# Altium PCB ESP32 with USBC PCB.PcbDoc (part 3 of 3)
Units mil, origin at the board's own origin, x right, y up, seen from the top; angles counter-clockwise.
Board outline 2700 x 1000 mil, 4 copper layers (L1, L2, L3, L4), stack 61.583 mil thick; 64 components, 73 nets, 299 pads, 161 vias.
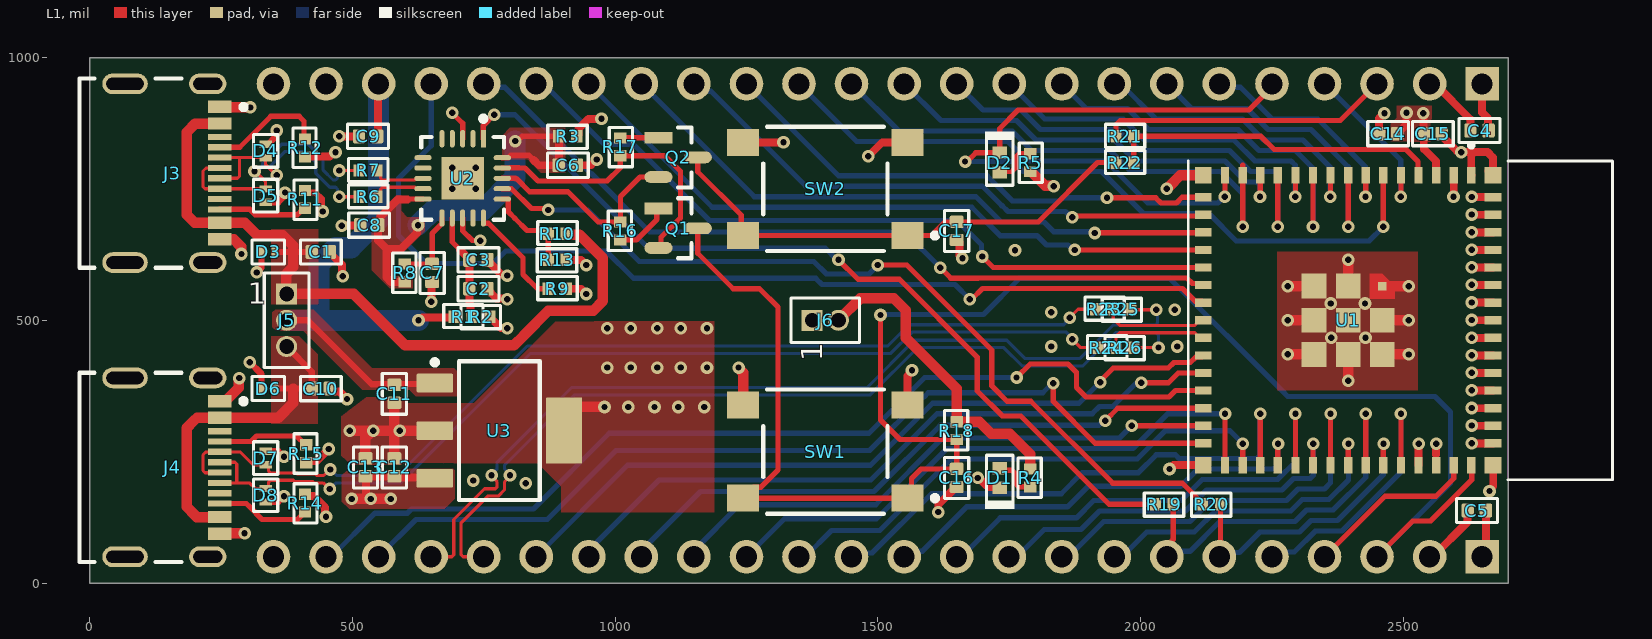
[diagram p0: L1 view]

## Via types
v1: diameter 24, hole 12, L1 to L4, tented both sides, 159 vias
v2: diameter 24/24/24 (per signal layer), hole 12, L1 to L4, tented both sides, 2 vias

## Nets (pads, with @x,y where several pads share a name; then routed paths per layer and width w, separated by ;. In a path a pad name is that pad's centre, name@x,y a point inside that pad or via, vN(x,y) a via of type N, cw(c..) or ccw(c..) an arc to the next point about the centre after c; other vN are vias at no path point) (continued)
GND: (continued)
  L1 w12: J3.A1B12 J3.A1B12@248.09,905.45 ; v1(305,420) 327.2,397.8 D6.2 ; v1@305.55,905.45 v1(306,905) ; v1(318,591) 327.2,600.2 D3.2 ; D8.2 359.41,154.41 v1@365,160 ; D7.2 359.41,250.59 v1(370,240) ; D5.2 359.41,724.41 369.7,734.7 369.7,740.7 v1(372,743) ; D4.2 339.92,835.04 353.7,848.82 353.7,858.7 v1(356,861) ; R11.1 414.04,742.96 429.85,742.96 441.7,731.11 441.7,709.3 v1(444,707)
  L1 w15: J3.B1A12 274.06,653.94 ; v1@288.23,630 288.23,626.77 v1(289,626) ; R14.1 413.13,165.89 426.3,165.89 448.28,143.91 448.28,127.72 v1(450,126) ; R12.1@410.45,811.43 457,811.43 465.56,820 v2(468,820) ; R15.1 415.13,232.12 432.12,232.12 v1(455,255) ; C10.1 457.2,368.62 461.52,364.31 475.69,364.31 v1(490,350) ; C1.1 457.2,628.62 480.28,605.55 480.28,585.72 v1(482,584) ; v1(475,850) C9.1 ; v2(480,680) 480.5,680.5 514.3,680.5 C8.1 ; v1(650,535) 651,536 651,571.8 C7.1 ; C2.1 757.2,558.62 774.1,541.72 793.28,541.72 v1(795,540) ; C3.1 757.2,613.62 784.1,586.72 793.28,586.72 v1(795,585) ; R9.2 935,560 v1(945,550) ; R13.1 935,615 v1(945,605) ; C6.1 954,795 v1(965,806) ; SW2.4 v1(1320.42,838.58) v1@1322,837 ; v1(1482,812) 1508.58,838.58 SW2.3 SW2.3@1559,836.08 ; SW1.3 1556.5,394.06 1565,402.56 v1(1565,405) ; v1(1615,135) 1615,149.17 1648.62,182.8 C16.2 ; C17.1 1651.38,652.8 1655.69,648.48 1655.69,623.31 v1(1661,618) ; v1(1690,200) 1692.44,200 1707.86,184.57 ; 1709.5,182.94 D1.1@1730.36,182.94 ; D1.1@1728.73,184.57 D1.1@1730.36,182.94 ; D1.1 D1.1@1730.36,182.94 ; v1(2055,217) 2062.41,224.41 U1.64 ; C14.1@2458.11,859.31 C14.1 2453.8,883.8 v1(2464,894) ; U1.42 v1@2528.9,264.57 ; J2.2 2556,50 2622,116 2622,137.2 C5.1 ; 2562.36,244.49 v1@2562.36,264.57 ; C15.1 2577.52,850.69 2577.52,846.66 2602.45,821.72 2608.28,821.72 v1(2610,820) 2635,820 ; v1@2595.83,735.43 U1.2 ; U1.1@2629.67,775.96 U1.1 2629.29,814.29 2635,820 ; v1@2630.47,265.75 U1.46 ; v1@2630.47,299.21 U1.47 ; v1@2630.47,332.68 U1.48 ; v1@2630.47,366.14 U1.49 ; v1@2630.47,399.61 U1.50 ; v1@2630.47,433.07 U1.51 ; v1@2630.47,466.54 U1.52 ; v1@2630.47,500 U1.53 ; v1@2630.47,533.46 U1.54 ; v1@2630.47,566.93 U1.55 ; v1@2630.47,600.39 U1.56 ; v1@2630.47,633.86 U1.57 ; v1@2630.47,667.32 U1.58 ; v1@2630.47,700.79 U1.59 ; v1@2630.47,734.25 U1.60 ; J1.1 2650,895.5 2661.31,884.19 2661.31,860.9 C4.1@2662.2,860 ; U1.62@2662.38,783.84 U1.62 2670.63,809.37 2660,820 2635,820 ; v1(2664,175) 2664,177.44 2671,184.44 2671,224.04 U1.65
  L1 w20: J4.B1A12@247.19,93.64 J4.B1A12 248.09,94.55 294.55,94.55 v1(295,95) ; J4.A1B12 249.45,347.87 260.28,347.87 284.23,371.83 284.23,389.23 v1(285,390) ; J3.A1B12@248.09,905.45 v1@305.55,905.45 ; 274.06,653.94 288.23,639.77 v1@288.23,630 ; v1(495,290) 525,290 ; C13.1 525,276.44 v1@537.8,289.23 ; v1@530,290 v1@538.15,290 ; v1@531.78,283.22 v1@537.8,289.23 ; C12.1 v1@580,290 ; C11.1 v1@580,290 ; v1(590,290) U3.2 ; U3.4 903.03,310.55 927.48,335 v1(980,335) ; v1(1235,410) 1235,408.92 1243.5,400.41 SW1.4 ; v1@2055,755 2075.59,775.59 U1.63 ; v1(2280,565) U1.71 ; v1@2280.04,435.04 U1.73 ; v1(2280.02,500.02) U1.72 ; v1(2395.02,384.98) U1.70 ; U1.69 v1@2395.04,615 ; U1.68 v1@2510.04,435.04 ; U1.67 v1@2510.04,500 ; U1.66 v1@2510.04,564.96 ; v1@537.8,289.23 538.15,289.23 v1@538.15,290 ; v1@538.15,290 v1(540,290) v1@580,290
  other v1: 370,165 830,190 730,195 2529.33,265 2562.8,265 2630.04,266.18 2630.04,299.65 2630.04,333.11 1025,335 1075,335 1120,335 1170,335 2630.04,366.57 2630.04,400.04 985,410 1030,410 1080,410 1125,410 1175,410 2630.04,433.5 2280.02,435.06 2510.06,435.02 1830,450 2070,450 2363,467 2428,467 2630.04,466.97 985,485 1030,485 1080,485 1125,485 1175,485 2510.06,499.98 2630.04,500.43 1830,515 2065,520 2362,532 2427,532 2630.04,533.9 2510.06,564.94 2630.04,567.36 2630.04,600.83 2395.06,615.02 1761,633 2630.04,634.29 2630.04,667.76 2630.04,701.22 2595.39,735 2630.04,734.69 690,750 735,750 2050,750 690,790 735,790
GPIO0: R21.2 R22.2 U1.4 | length 637.7
  L1 w10: R22.2 R21.2 2229.25,850 2254.25,825 2505,825 2528.02,801.98 2528.02,776.47 U1.4
GPIO1: J1.4 U1.5 | length 315.2
  L1 w10: v1@2495.43,735.43 U1.5
  L4 w10: J1.4 2495,805 v1(2495,735)
GPIO2: D2.1 J1.5 U1.6 | length 1653.2
  L1 w10: v1(1666,802) 1669.79,802 1686.49,818.7 D2.1 1732,865 1767,900 2206,900 2250,944 J1.5 ; v1(2461.97,678.03) U1.6
  L4 w10: v1(1666,802) 1757.33,802 1776.33,783 1925.43,783 2005.43,703 2130,703 2181.97,651.03 2434.97,651.03 v1(2461.97,678.03) ; J1.5 J1.5@2260,950
GPIO3: J1.6 U1.7 | length 440.6
  L1 w10: v1@2428.5,735.43 U1.7
  L4 w10: J1.6 2156.62,943.38 2190.15,943.38 2250.53,883 2337,883 2428.07,791.93 v1(2428.07,735)
GPIO4: J1.7 U1.8 | length 621.4
  L1 w10: v1(2395.04,678.03) U1.8
  L4 w10: J1.7 2097,903 2202.25,903 2242.25,863 2324,863 2395,792 2395,729.89 2395.04,729.85 v1@2395.04,678.66
GPIO5: J1.8 U1.9 | length 573.1
  L1 w10: v1@2361.57,735.43 U1.9
  L4 w10: J1.8 1962.24,950 2029.24,883 2193.96,883 2233.96,843 2309,843 2361.14,790.86 v1(2361.14,735)
GPIO6: J1.9 U1.10 | length 754.5
  L1 w10: v1(2328.11,678.03) U1.10
  L4 w10: J1.9 1850,949.61 1896.61,903 1975.14,903 2015.14,863 2185.68,863 2225.68,823 2294.42,823 2329,788.43 2329,678.92 v1(2328.11,678.03)
GPIO7: J1.10 U1.11 | length 708.5
  L1 w10: v1@2294.65,735.43 U1.11
  L4 w10: J1.10 1750.75,950 1817.75,883 1966.85,883 2006.85,843 2177.4,843 2217.39,803 2286.14,803 2294.21,794.93 v1(2294.21,735)
GPIO8: J1.11 U1.12 | length 879.5
  L1 w10: v1(2261.18,678.03) U1.12
  L4 w10: J1.11 1700,900 1772.47,900 1809.47,863 1958.57,863 1998.57,823 2169.11,823 2209.11,783 2255.32,783 2261.18,777.14 v1(2261.18,678.03)
GPIO9: J1.12 U1.13 | length 819.1
  L1 w10: v1@2227.72,735.43 U1.13
  L4 w10: J1.12 1620,880 1764.18,880 1801.18,843 1950.28,843 1990.28,803 2160.83,803 2200.83,763 2220.86,763 2226.72,757.14 2226.72,735.57 v1(2227.28,735)
GPIO10: J1.13 U1.14 | length 1010.9
  L1 w10: v1(2194.25,678.03) U1.14 2194.25,795
  L4 w10: J1.13 1540,860 1755.9,860 1792.9,823 1942,823 1982,783 2152.54,783 2194.25,741.29 v1(2194.25,678.03)
GPIO11: J1.14 U1.15 | length 949.5
  L1 w10: v1@2160.79,735.43 U1.15
  L4 w10: J1.14 1460,840 1747.62,840 1784.62,803 1933.72,803 2013.72,723 2147.5,723 2159.5,735 v1(2160.35,735)
GPIO12: J1.15 U1.16 | length 973.1
  L1 w10: v1(1936,733) 2028.91,732.91 2038.82,723 2068.13,723 2079.38,734.25 U1.16
  L4 w10: J1.15 1425,775 1708,775 1756,727 1845.18,727 1851.18,733 v1(1936,733)
GPIO13: J1.16 U1.17 | length 1076.6
  L1 w10: v1(1870,696) 1872.39,698.39 2117.06,698.39 U1.17
  L4 w10: J1.16 1164.61,950 1178.85,935.77 1182.23,935.77 1363,755 1699,755 1736,718 1736.72,718 1747.72,707 1857.14,707 1868.14,696 v1(1870,696)
GPIO14: J1.17 U1.18 | length 1187.4
  L1 w10: v1(1913,666) 1913.66,666.66 2118.79,666.66 U1.18
  L4 w10: J1.17 1265,735 1687,735 1735,687 1816,687 1834.33,668.67 1909.67,668.67 v1@1912.67,665.67
GPIO15: J1.18 U1.19 | length 1300.4
  L1 w10: v1(1874.79,633.86) U1.19
  L4 w10: J1.18 1185,715 1678.72,715 1732.72,661 1803,661 1821,643 1861.93,643 1871.07,633.86 v1(1874.79,633.86)
GPIO16: J1.19 U1.20 | length 1426.5
  L1 w10: v1(1698.66,621.34) 1719.61,600.39 U1.20
  L4 w10: J1.19 864,950 979,835 1035,835 1180,690 1650.93,690 1697.32,643.61 1697.32,622.68 v1(1698.66,621.34)
GPIO17: J1.20 U1.21 | length 1528.9
  L1 w10: v1(1619,600) 1639,580 1690.5,580 1690.9,580.39 2087.89,580.39 2098.48,569.8 2116.57,569.8 U1.21
  L4 w10: J1.20 756.83,943.17 790.36,943.17 872.09,861.44 872.09,860.73 953.82,779 955,779 1066,668 1551,668 v1(1619,600)
GPIO18: J1.21 U1.22 | length 1935.7
  L1 w10: v1(1675,540) 1678.79,540 1699.18,560.39 2079.61,560.39 2093.07,546.93 2103.66,536.34 2116.57,536.34 U1.22
  L4 w10: J1.21 650,905 650,832 600,782 588,770 588,661 641,608 768,608 792,632 983,632 1035,580 1381.72,580 1393.72,568 1647,568 v1(1675,540)
GPIO21: J2.19 U1.25 | length 1429.3
  L1 w10: v1(1923,382) 1923,384 1948,409 2052.72,409 2063.32,419.61 2094.61,419.61 2105.2,430.2 2116.57,430.2 U1.25
  L4 w10: J2.19 1024,224 1486.29,224 1604.29,342 1883,342 v1(1923,382)
GPIO26: J2.18 U1.26 | length 1322.8
  L1 w10: v1(2001,381) 2053,381 2071.61,399.61 U1.26
  L4 w10: J2.18 950,64.61 952.39,64.61 1083.78,196 1486.58,196 1612.58,322 1907.82,322 1921.82,336 1947,336 1989.32,378.32 1998.32,378.32 v1(2001,381)
GPIO33: J2.17 U1.28 | length 1195.1
  L1 w10: v1(1933,309) 1956.68,332.68 U1.28
  L4 w10: J2.17 1050,64.61 1053.39,64.61 1162.78,174 1492.86,174 1618.86,300 1920.21,300 1929.21,309 v1(1933,309)
GPIO34: J2.16 U1.29 | length 1067.7
  L1 w10: 1995,299 1995.21,299.21 U1.29
  L4 w10: J2.16 1150,62 1237,149 1496.15,149 1623.15,276 1960,276 v1(1983,299)
GPIO35: J2.15 U1.31 | length 1121
  L1 w10: U1.31 v1(2160.79,321.97)
  L4 w10: J2.15 1322.28,122.28 1497.72,122.28 1631.43,256 1985.43,256 2051.4,321.97 v1(2160.79,321.97)
GPIO36: J2.14 U1.32 | length 994.6
  L1 w10: U1.32 v1@2194.25,264.57
  L4 w10: J2.14 1362,50 1412,100 1503.72,100 1639.72,236 1993.72,236 2047.72,290 2169.69,290 v1(2194.69,265)
GPIO37: J2.13 U1.33 | length 1039.6
  L1 w10: U1.33 v1(2227.72,321.97)
  L4 w10: J2.13 1457.23,57.23 1489.23,57.23 1602,170 1849,170 1889,210 1996,210 2030,244 2066.18,244 2073.18,237 2221.14,237 2227,242.86 2227,321.25 v1(2227.72,321.97)
GPIO38: J2.12 U1.34 | length 863.6
  L1 w10: U1.34 v1@2261.18,264.57
  L4 w10: J2.12 1560.33,60.33 1584.33,60.33 1669,145 1861,145 1900,184 2076.11,184 2109.11,217 2252.54,217 2261.61,226.07 v1(2261.61,265)
GPIO39: J2.11 U1.35 | length 908.3
  L1 w10: U1.35 v1(2294.65,321.97)
  L4 w10: J2.11 1659,50 1733,124 1878,124 1911,157 2077.4,157 2117.4,197 2260.83,197 2294.5,230.67 2294.5,238.5 2294.65,238.65 v1(2294.65,321.97)
GPIO40: J2.10 U1.36 | length 743
  L1 w10: U1.36 v1@2328.11,264.57
  L4 w10: J2.10 1764.61,50 1816.61,102 1886.72,102 1921.72,137 1948,137 2085.68,137 2125.68,177 2269.11,177 2291.11,199 2322.69,199 2328.54,204.86 v1(2328.54,265)
GPIO41: J2.9 U1.37 | length 798.7
  L1 w10: U1.37 v1(2361.57,321.97)
  L4 w10: J2.9 1863,50 1930,117 2093.96,117 2133.96,157 2277.4,157 2299.4,179 2349.86,179 2361.57,190.71 v1(2361.57,321.97)
GPIO42: J2.8 U1.38 | length 614.9
  L1 w10: U1.38 v1@2395.04,264.57
  L4 w10: J2.8 1964.61,50 2011.61,97 2102.25,97 2142.25,137 2285.68,137 2307.68,159 2358.15,159 2395.47,196.33 v1(2395.47,265)
GPIO45: J2.5 U1.41 | length 520.4
  L1 w10: U1.41 v1(2495.43,321.97)
  L4 w10: J2.5 2259,59 2292.53,59 2332.53,99 2383,99 2495.43,211.43 v1(2495.43,321.97)
GPIO46: J2.4 U1.44 | length 333.1
  L1 w10: J2.4 2465,165 2562,165 2595.83,198.83 U1.44
GPIO47: J2.23 U1.27 | length 1869.5
  L1 w10: v1(1764,391) 1790,417 1861.9,417 1878,400.9 1878,372 1896,354 2054.28,354 2066.43,366.14 U1.27
  L4 w10: J2.23 460,50 543,133 604.72,133 612.72,141 845,141 989,285 1483.18,285 1589.18,391 v1(1764,391)
GPIO48: J2.22 U1.30 | length 1773.7
  L1 w10: v1(1834,380) 1834,345.49 1913.74,265.75 U1.30
  L4 w10: J2.22 621,121 871,121 1002,252 1484.43,252 1586.43,354 1588.01,354 1596.01,362 1813.82,362 1831.82,380 v1(1834,380)
NetD1_2: D1.2 R4.1 | length 83.3
  L1 w10: D1.2 1735.88,214.82 1754.92,214.82 1760.78,208.96 1760.78,190.98 1768.76,182.99 R4.1
NetD2_2: D2.2 R5.1 | length 93.6
  L1 w10: D2.2 1733.64,782.94 1754.92,782.94 1763.19,791.21 1763.19,811.15 1769.05,817.01 R5.1 1791.18,817.01 R5.1@1796.81,822.64
NetJ3_A5: J3.A5 R12.2 | length 223.3
  L1 w10: J3.A5 285.95,829.13 344.82,888 399,888 408.23,878.77 408.23,846.77 R12.2
NetJ3_B5: J3.B5 R11.2 | length 171.5
  L1 w10: J3.B5 304.9,711.02 314.92,701 395.7,701 402.06,707.36 404.37,707.36 R11.2
NetJ4_A5: J4.A5 R15.2 | length 175.8
  L1 w10: J4.A5 307.3,269.29 318.01,280 393.83,280 410.82,263.01 R15.2
NetJ4_B5: J4.B5 R14.2 | length 181.4
  L1 w10: J4.B5 298.31,151.18 305,144.5 328.5,121 396,121 403.19,128.19 403.19,129.37 408.82,135 R14.2
NetQ1_1: Q1.1 R16.1 | length 107.4
  L1 w10.01: R16.1 1040.57,652.99 1079.56,691.99 1079.56,709.39 Q1.1
NetQ2_1: Q2.1 R17.1 | length 72.7
  L1 w10: R17.1 1010.2,847.2 1082.38,847.2 Q2.1
NetR9_1: R9.1 U2.15 | length 193.5
  L1 w10: U2.15@749.6,684.57 759.39,684.57 769.74,674.21 773.96,670 825,618.96 825,587.43 852.43,560 R9.1
RTS_FTDI: Q1.2 R17.2 U2.19 | length 558.1
  L1 w10: U2.19 799.79,789.69 800.11,790.01 816.68,790.01 817,789.69 828.5,789.69 853.18,765 985,765 1010,790 R17.2 1094.78,812.99 1124.29,783.48 1124.29,694.93 1087.37,658 1087.37,642.39 Q1.2
RXD_FTDI: R19.2 U2.1 | length 1656.5
  L1 w10: U2.1 749.37,870.36 v1(770,890.99) ; v1(1425.27,615) 1462.27,578 1541,578 1689,430 1689,366 1737,318 1772,318 1940,150 R19.2
  L4 w10: v1(770,890.99) 809,890.99 809.5,890.99 1063.5,637 1400.42,637 1422.42,615 v1(1425.27,615)
TXD_FTDI: R20.2 U2.17 | length 1635.8
  L1 w10: U2.17 803.14,750.31 841,712.46 870.54,712.46 v1(873,710) ; v1(1500,605) 1555,605 1717,443 1717,375 1746,346 1791,346 1947,190 2079.17,190 2117.99,151.18 R20.2
  L4 w10: v1(873,710) 948,710 1046,612 1378,612 1402,588 1483,588 v1(1500,605)
U0RXD: J2.6 R20.1 U1.40 | length 576.6
  L1 w10: J2.6 2152.01,52.01 R20.1 ; U1.40 v1@2461.97,264.57
  L4 w10: J2.6 2158.23,58.23 2188.23,58.23 2227,97 2302.25,97 2324.25,119 2374.72,119 2446.8,191.09 2461.54,205.83 2461.54,221.74 2462.4,222.6 v1(2462.4,265)
U0TXD: J2.7 R19.1 U1.39 | length 764.5
  L1 w10: J2.7 2060.33,60.33 2060.33,81.18 2062.01,82.86 R19.1 ; U1.39 v1(2428.5,321.97)
  L4 w10: J2.7 2060.33,60.33 2093.86,60.33 2150.53,117 2293.96,117 2315.96,139 2366.43,139 2428.5,201.07 2428.5,232.86 v1(2428.5,321.97)
VBUS_SENSE: R10.1 R13.2 U2.16 | length 179.1
  L1 w10: U2.16 796.72,730.63 796.94,730.4 796.94,706.06 809,694 832.25,670.75 867.36,670.75 872.99,665.12 R13.2
pads on no net: J1.24 J3.A8 J3.B8 J4.A8 J4.B8 U2.2 U2.4 U2.5 U2.6 U2.7 U2.14

## Polygon pours and split planes (outlines as drawn)
GND on L1 "GND_L01_P015" (solid, pour order 15): 1189.03,134.97 1189.03,498 887,498 730.97,341.97 605.03,341.97 593.03,353.97 526.46,353.97 479,317 479,241.76 498,225 592,225 600.44,228.76 853.77,227.23 898,183 898,134.97 946.03,134.97 1202.03,134.97
GND on L1 "GND_L01_P011" (solid, pour order 11): 2260,630 2527,630 2527,367 2260,367 2260,633
+5V_VBUS2 on L1 "+5V_VBUS2_L01_P010" (solid, pour order 10): 399,470 433.93,435.07 433.93,303 346,303 346,470
+5V_VBUS1 on L1 "+5V_VBUS1_L01_P009" (solid, pour order 9): 346,530 435,530 435,673 346,673
+5V on L1 "+5V_L01_P008" (solid, pour order 8): 348,515 353,520 427,520 538,409 694,409 703,400 703,358 700,355 621,355 610,366 610,368 519,368 407,480 355,480 348,487
+3V3_REG on L1 "+3V3_REG_L01_P006" (solid, pour order 6): 592.6,214.01 600.41,217.65 695,218.27 695,160 676,141 494,141 480,155 480,205 488.99,213.99
+3V3_FTDI on L1 "+3V3_FTDI_L01_P004" (solid, pour order 4): 615,561 571,561 537,595 537,695.06 537.93,696 545.21,696 545.47,701.15 551,705 584,738 593,738 593,708 605,696 632,696 638,690 638,670 597,628 575,628 575,584 615,584
+3V3_FTDI on L1 "+3V3_FTDI_L01_P001" (solid, pour order 1): 905,866 905,781 858.5,781 842.15,798.86 832.46,806 785.41,806 785.41,850.59 785,851 800,866
+3V3 on L1 "+3V3_L01_P000" (solid, remove dead copper, pour order 0): 2487,885 2476,874 2476,840 2551,840 2551,878 2554,884 2554,908 2487,908
GND on L2 "GND_L02_P019" (solid, pour order 19): 20,20 2680,20 2680,980 20,980
+3V3_REG on L2 "+3V3_REG_L02_P018" (solid, pour order 18): 480,122.5 670,122.5 670,210 480,210
+3V3 on L2 "+3V3_L02_P016" (solid, pour order 16): 2680,20 2680,980 900,980 900,840 1120,840 1260,700 1260,580 1360,580 1405,535 1405,470 1455,470 1455,555 1400,610 1400,665 1795,665 1925,795 2525,795 2525.36,794.64 2525.35,236.78 2468.3,176.84 2357.31,175.66 2299.99,112.5 2300.04,20 2300,19.96
GND on L3 (split plane): 2679.9,20.1 20.1,20.1 20.1,979.9 2679.9,979.9

## Text inside footprints (layer, text, board x,y; h text height)
J1: Bottom Overlay "1" at 2655,864 h40 r270
J2: Bottom Overlay "1" at 2651,127 h40 r270
J5: Top Overlay "1" at 301,531 h40
J6: Top Overlay "1" at 1394,422 h40 r90